# Altium PCB PCB1.PcbDoc
Units mm, origin at the board's own origin, x right, y up, seen from the top; angles counter-clockwise.
Board outline 100 x 90 mm, 2 copper layers (Top Layer, Bottom Layer); 30 components, 25 nets, 182 pads, 0 vias.
Unrouted connection lines stored in the file: 36.
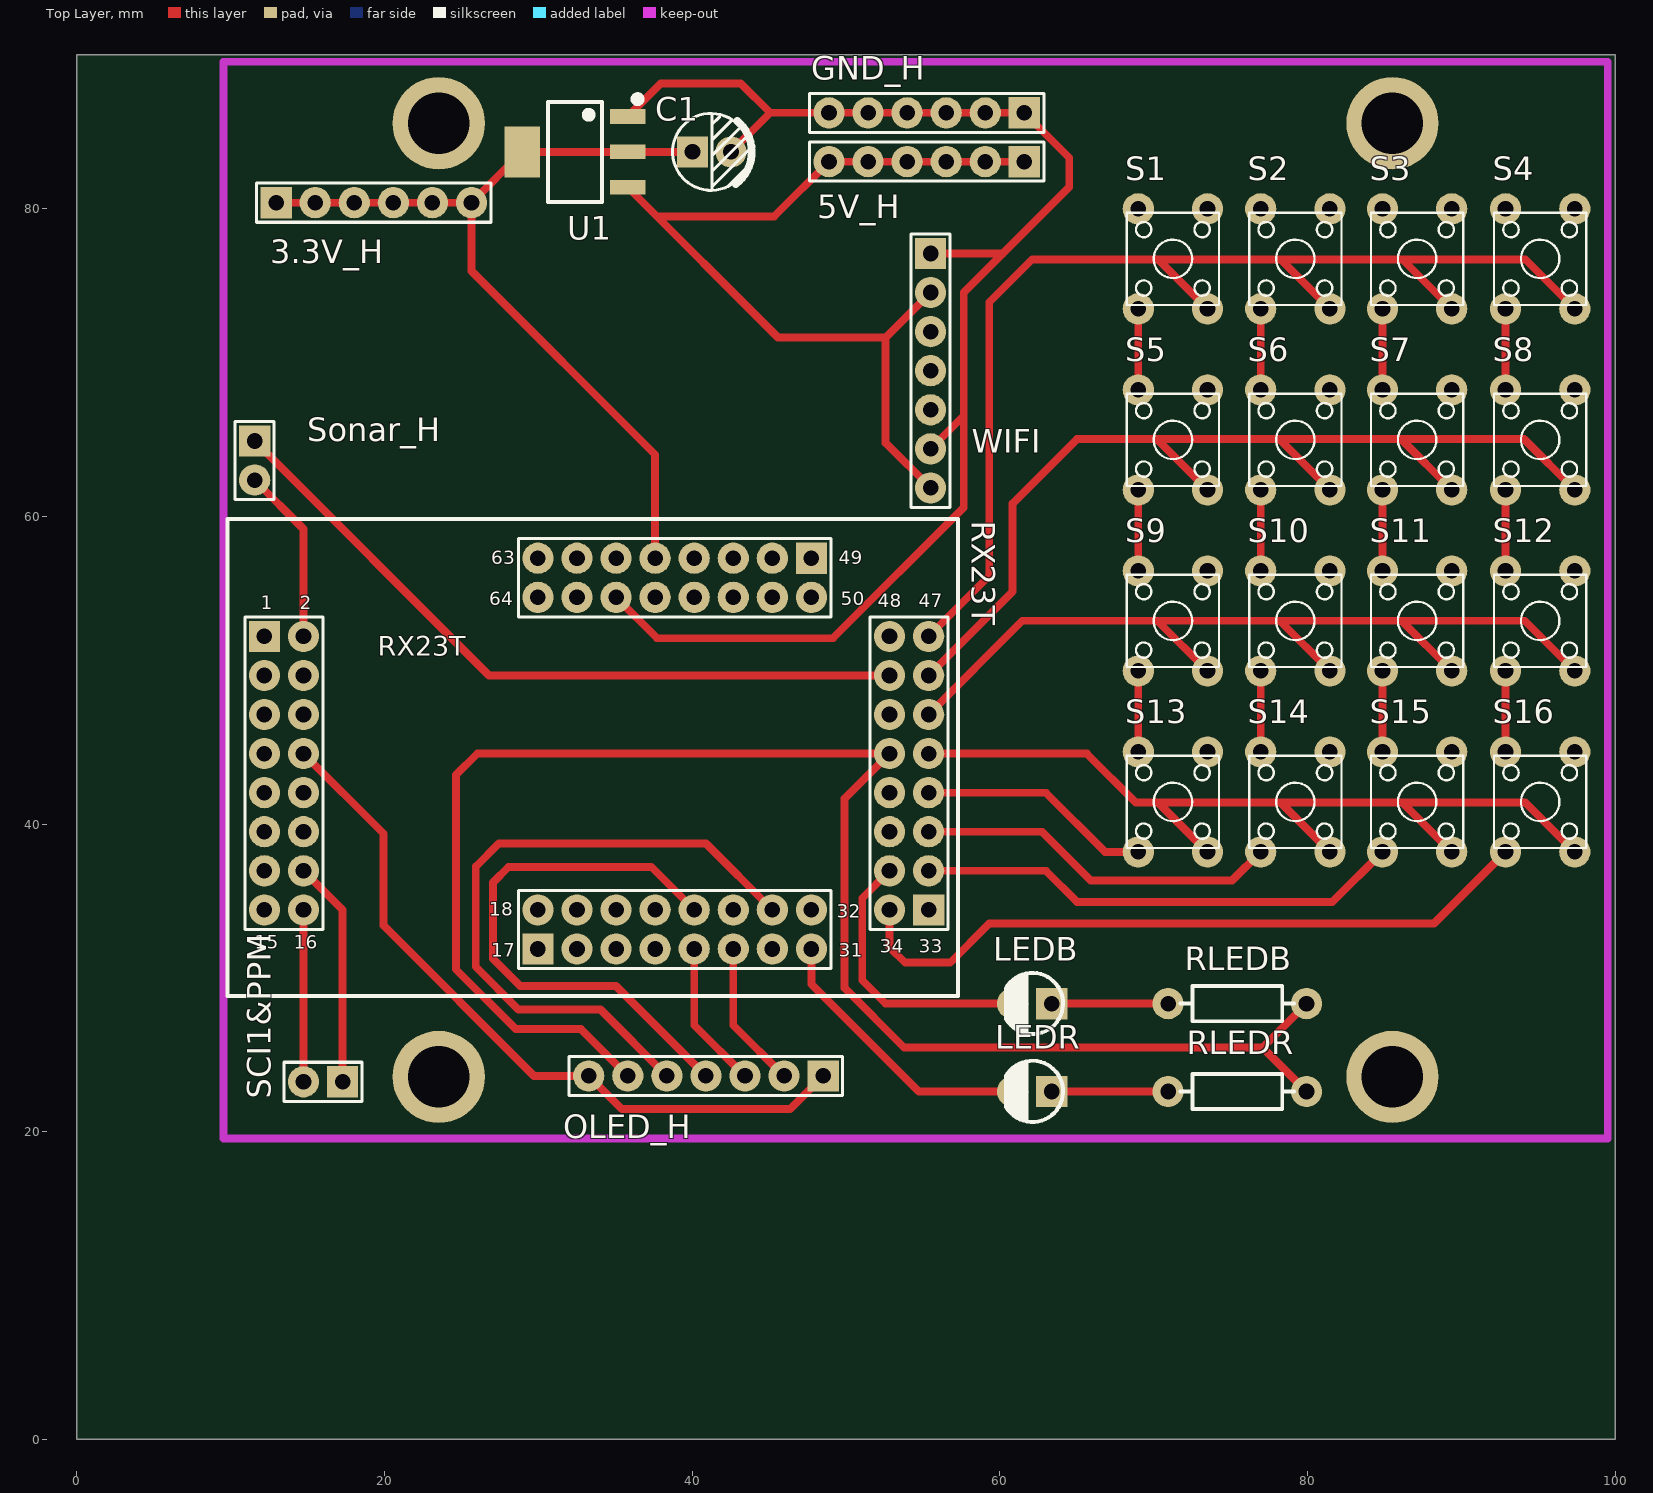
[diagram p0: Top Layer view]
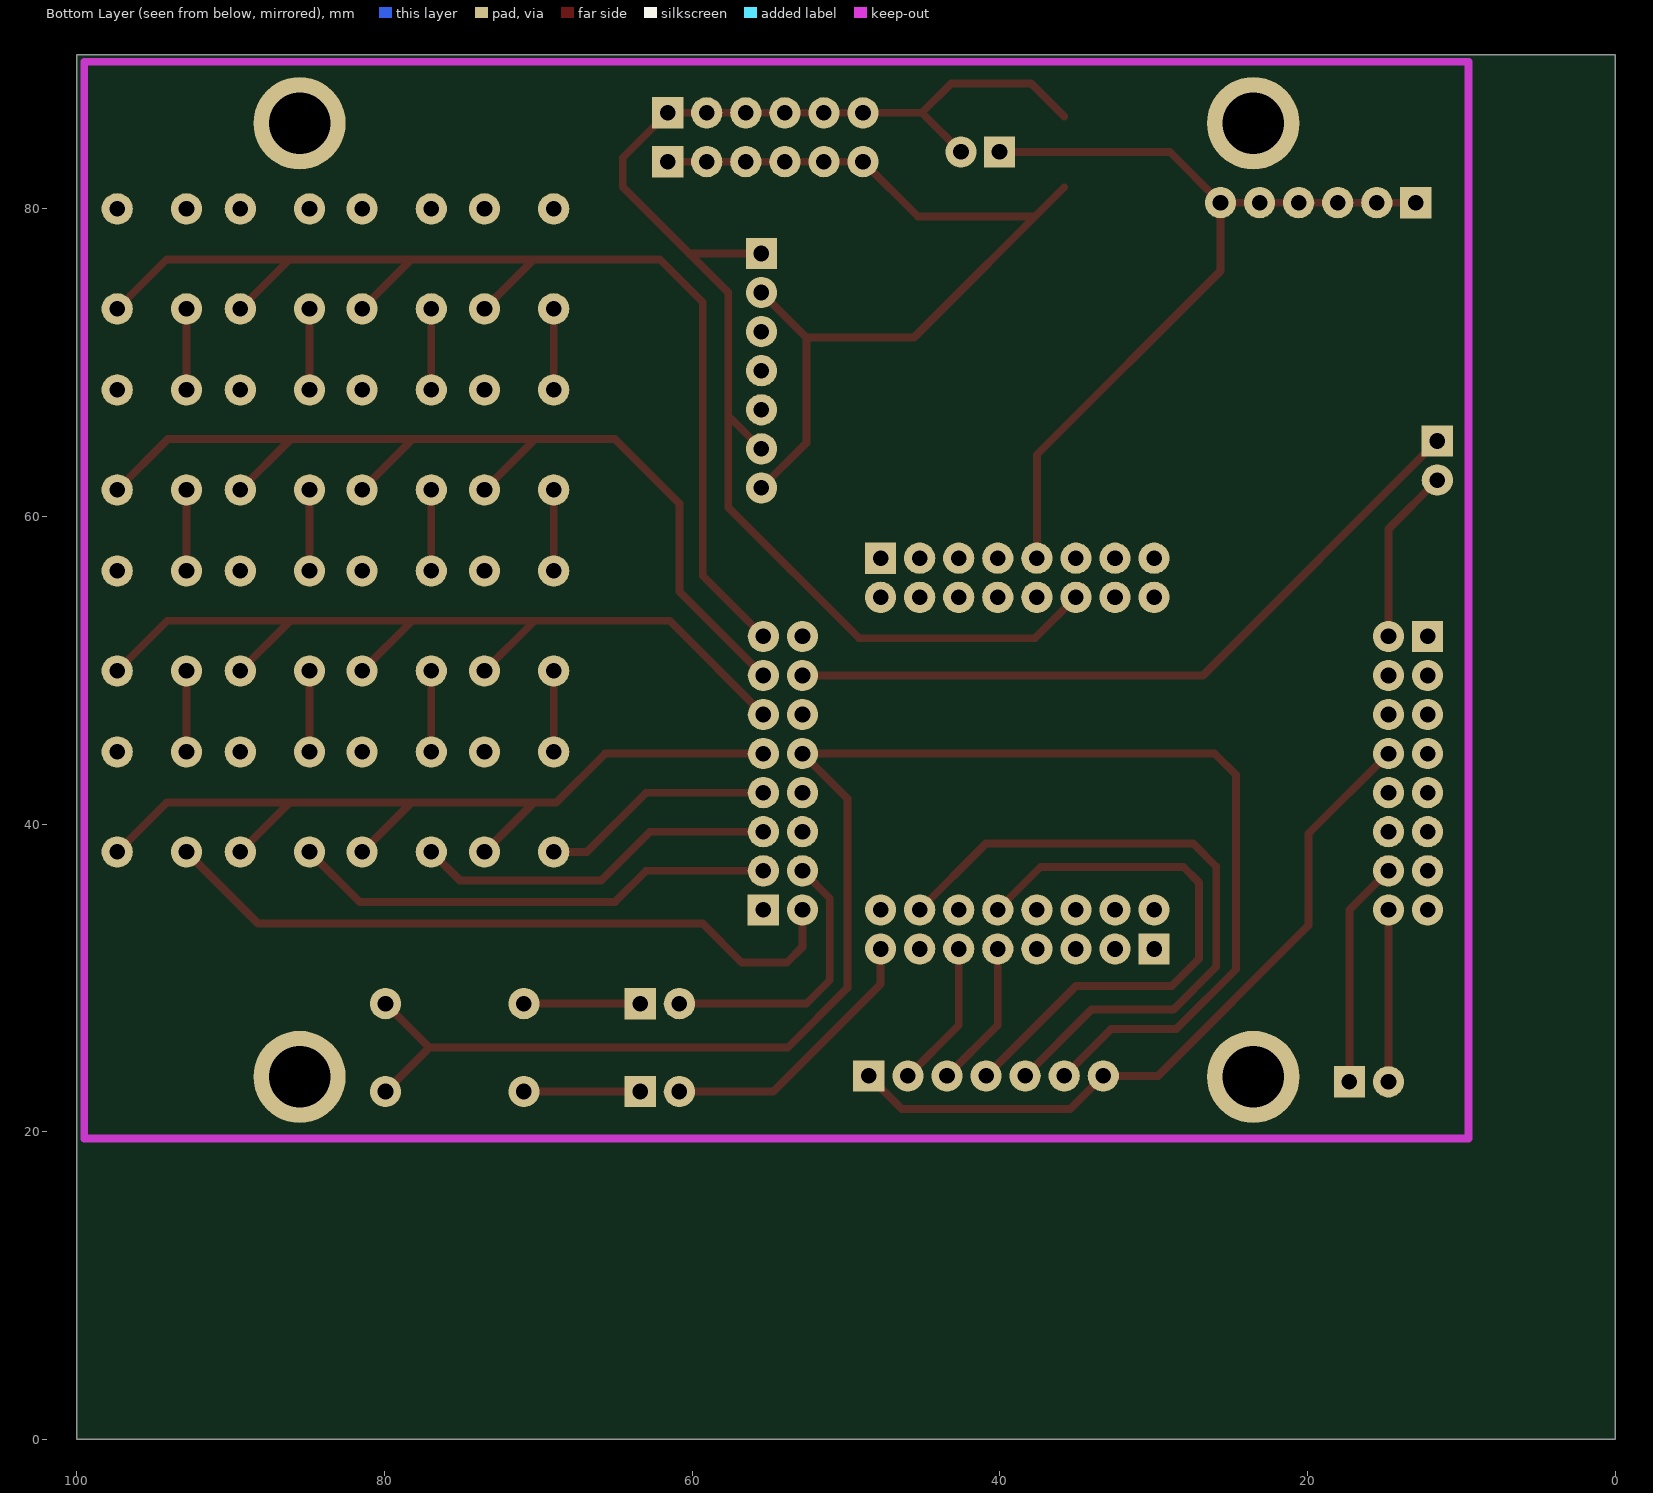
[diagram p1: Bottom Layer view, seen from below]
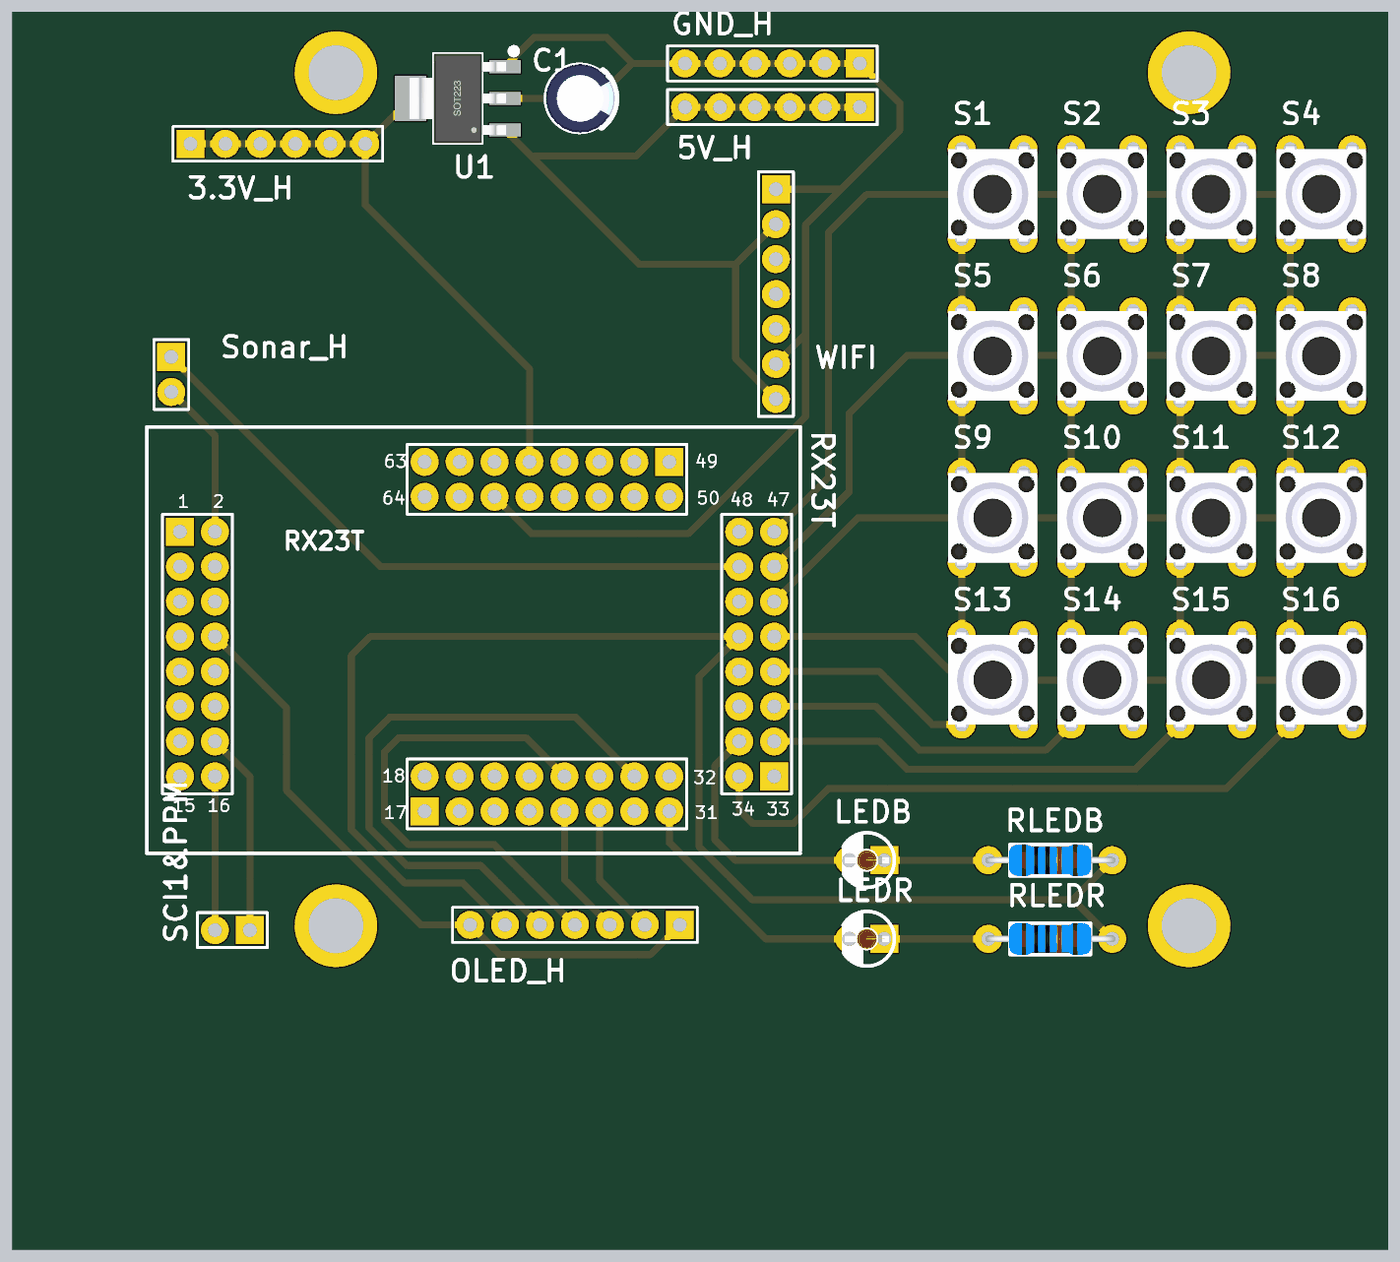
[diagram p2: 3D render of the assembled board from above, using the file's embedded part models]

## Layer stack, top to bottom
Top Solder: solder mask 0.0102, Solder Resist, Dk 3.5
Top Layer: signal copper 0.0356
Dielectric 1: dielectric 0.32, FR-4, Dk 4.8
Bottom Layer: signal copper 0.0356
Bottom Solder: solder mask 0.0102, Solder Resist, Dk 3.5

## Board outline
0,0 100,0 100,90 0,90

## Design rules (kind name [scope] priority, off if disabled: settings)
Clearance [All] p1: gap=0.508
PolygonConnect [All] p1: connectstyle=Relief reliefconductorwidth=0.254 reliefentries=4 polygonreliefangle="90 Angle" airgapwidth=0.254
RoutingVias [All] p1: holewidth=0.711 width=1.27 viastyle="Through Hole" minholewidth=0.711 minwidth=1.27 maxholewidth=0.711 maxwidth=1.27
SolderMaskExpansion [All] p1: expansion=0.102
Width [All] p1: maxlimit=0.508 minlimit=0.508 preferedwidth=0.508
30 further rules are at their usual default settings.

## Components (designator, comment, footprint, x,y, rotation, side; value= is the part's Value field where it differs from the comment)
3.3V_H "Header 6" HDR1X6 12.954,80.391 r0 top
5V_H "Header 6" HDR1X6 61.595,83.058 r180 top
C1 "Cap Pol3" "CAP 2.5*5*11" 41.275,83.693 r0 top
GND_H "Header 6" HDR1X6 61.595,86.233 r180 top
LEDB "LED" "LED 3MM-R" 62.103,28.321 r180 top
LEDR "LED" "LED 3MM-R" 62.103,22.606 r180 top
OLED_H "Header 7" HDR1X7 48.514,23.622 r180 top
RLEDB "1K" "RS 1/4W" 75.438,28.321 r0 top
RLEDR "1K" "RS 1/4W" 75.438,22.606 r0 top
RX23T "RX23T" RFR 33.782,44.577 r0 top
S1 "贴片轻触开关" SW-6*6 71.252,76.741 r0 top
S2 "贴片轻触开关" SW-6*6 79.211,76.741 r0 top
S3 "贴片轻触开关" SW-6*6 87.127,76.741 r0 top
S4 "贴片轻触开关" SW-6*6 95.128,76.741 r0 top
S5 "贴片轻触开关" SW-6*6 71.252,64.972 r0 top
S6 "贴片轻触开关" SW-6*6 79.211,64.972 r0 top
S7 "贴片轻触开关" SW-6*6 87.127,64.972 r0 top
S8 "贴片轻触开关" SW-6*6 95.128,64.972 r0 top
S9 "贴片轻触开关" SW-6*6 71.252,53.204 r0 top
S10 "贴片轻触开关" SW-6*6 79.211,53.204 r0 top
S11 "贴片轻触开关" SW-6*6 87.127,53.204 r0 top
S12 "贴片轻触开关" SW-6*6 95.128,53.204 r0 top
S13 "贴片轻触开关" SW-6*6 71.252,41.435 r0 top
S14 "贴片轻触开关" SW-6*6 79.211,41.435 r0 top
S15 "贴片轻触开关" SW-6*6 87.127,41.435 r0 top
S16 "贴片轻触开关" SW-6*6 95.128,41.435 r0 top
SCI1&PPM "Header 2" HDR1X2 17.272,23.241 r180 top
Sonar_H "Header 2" HDR1X2 11.557,64.897 r270 top
U1 "LM1117IMP-3.3" SOT223_M 32.385,83.693 r270 top
WIFI "Header 7" HDR1X7 55.499,77.089 r270 top

## Footprints (in the part's own frame and the unit in brackets; to place one, negate y for a bottom-side part, rotate by r counter-clockwise, add the part's x,y. Pads: shape width x height; smd on the part's side, far side on the other; paste and mask are expansions set on the pad)
"CAP 2.5*5*11" [mil] "脚距2.5mm直径5mm高度11mm"
  rect 80x80 hole 40: 1(-49.21,0)
  round 80 hole 40: 2(49.21,0)
  silkscreen extent -100,-98 102,98, body extent -98,-98 99,98, height 434
HDR1X2 [mil] "Connector; Header; 2 Position"
  rect 80x80 hole 40: 1(0,0)
  round 80 hole 40: 2(100,0)
  silkscreen extent -50,-50 150,50
HDR1X6 [mil] "Connector; Header; 6 Position"
  rect 80x80 hole 40: 1(0,0)
  round 80 hole 40: 2(100,0) 3(200,0) 4(300,0) 5(400,0) 6(500,0)
  silkscreen extent -50,-50 550,50
HDR1X7 [mil] "Connector; Header; 7 Position"
  rect 80x80 hole 40: 1(0,0)
  round 80 hole 40: 2(100,0) 3(200,0) 4(300,0) 5(400,0) 6(500,0) 7(600,0)
  silkscreen extent -50,-50 650,50
"LED 3MM-R" [mil] "红色3mm直插LED"
  rect 80x80 hole 40: 1(-50,0)
  round 80 hole 40: 2(50,0)
  silkscreen extent -79,-79 68,78, body extent -77,-77 65,77, height 219
RFR [mil]
  rect 80x80 hole 40: 1(-850,300) 17(-150,-500) 33(850,-400) 49(550,500)
  round 80 hole 40: 2(-750,300) 3(-850,200) 4(-750,200) 5(-850,100) 6(-750,100) 7(-850,0) 8(-750,0) 9(-850,-100) 10(-750,-100) 11(-850,-200) 12(-750,-200) 13(-850,-300) 14(-750,-300) 15(-850,-400) 16(-750,-400) 18(-150,-400) 19(-50,-500) 20(-50,-400) 21(50,-500) 22(50,-400) 23(150,-500) 24(150,-400) 25(250,-500) 26(250,-400) 27(350,-500) 28(350,-400) 29(450,-500) 30(450,-400) 31(550,-500) 32(550,-400) 34(750,-400) 35(850,-300) 36(750,-300) 37(850,-200) 38(750,-200) 39(850,-100) 40(750,-100) 41(850,0) 42(750,0) 43(850,100) 44(750,100) 45(850,200) 46(750,200) 47(850,300) 48(750,300) 50(550,400) 51(450,500) 52(450,400) 53(350,500) 54(350,400) 55(250,500) 56(250,400) 57(150,500) 58(150,400) 59(50,500) 60(50,400) 61(-50,500) 62(-50,400) 63(-150,500) 64(-150,400)
  silkscreen extent -945,-620 925,600
"RS 1/4W" [mil] "直插色环电阻，脚距9mm，直径2.3mm"
  round 80 hole 40: 1(-177.17,0) 2(177.17,0)
  silkscreen extent -145,-45 145,45, body extent -186,-46 186,46, height 91
SOT223_M [mm] "6.4x7x1.6mm(长宽高)"
  rect 0.95x2.3 smd: 1(-2.3,3.429) 2(0,3.429) 3(2.3,3.429)
  rect 3.3x2.3 smd: 2(0,-3.429)
  silkscreen extent -3.63,-1.75 3.25,4.26, body extent -3.25,-3.51 3.25,3.51, height 1.65
SW-6*6 [mil]
  round 80 hole 40: 1(-88.58,-127.95) 1(-88.58,127.95) 2(88.58,-127.95) 2(88.58,127.95)
  silkscreen extent -118,-118 118,118, body extent -128,-163 128,163, height 197

## Part data
3.3V_H 5V_H GND_H: "Header, 6-Pin"
C1: "Polarized Capacitor (Surface Mount)"
OLED_H WIFI: "Header, 7-Pin"
RLEDB RLEDR: library part R, "R_0603"
SCI1&PPM Sonar_H: "Header, 2-Pin"
U1: library part Component_1_1

## Free pads (board coordinates)
  round 6 hole 4: 8(23.525,23.558) 9(85.525,23.558) 10(23.525,85.558) 11(85.525,85.558)

## Nets (pads, with @x,y where several pads share a name; then routed paths per layer and width w, separated by ;. In a path a pad name is that pad's centre, name@x,y a point inside that pad or via, vN(x,y) a via of type N, cw(c..) or ccw(c..) an arc to the next point about the centre after c; other vN are vias at no path point)
3.3V: 3.3V_H.1 3.3V_H.2 3.3V_H.3 3.3V_H.4 3.3V_H.5 3.3V_H.6 C1.1 OLED_H.6 RLEDB.2 RLEDR.2 RX23T.42 RX23T.57 U1.2 | length 165
  Top Layer w0.508: 3.3V_H.1 3.3V_H.2 3.3V_H.3 3.3V_H.4 3.3V_H.5 3.3V_H.6 ; OLED_H.6 32.766,26.67 28.535,26.67 24.638,30.567 24.638,43.18 26.035,44.577 RX23T.42 49.911,41.656 49.911,29.337 53.785,25.463 77.081,25.463 RLEDB.2 ; RX23T.57 37.592,64.008 25.654,75.946 3.3V_H.6 ; C1.1 35.814,83.693 28.956,83.693 3.3V_H.6 ; 77.271,25.273 RLEDR.2
5V: 5V_H.1 5V_H.2 5V_H.3 5V_H.4 5V_H.5 5V_H.6 U1.3 WIFI.2 WIFI.7 | length 61.2
  Top Layer w0.508: U1.3 45.579,71.628 52.578,71.628 ; 37.832,79.502 45.339,79.502 5V_H.6 5V_H.5 5V_H.4 5V_H.3 5V_H.2 5V_H.1 ; WIFI.7 52.578,64.77 52.578,71.628 ; WIFI.2 52.578,71.628
C1: RX23T.39 S1.1 S5.1 S9.1 S13.1 | length 31
  Top Layer w0.508: RX23T.39 62.992,42.037 66.844,38.185 S13.1@69.002,38.185 ; S13.1@69.002,44.685 S9.1@69.002,49.954 ; S9.1@69.002,56.454 S5.1@69.002,61.722 ; S5.1@69.002,68.222 S1.1@69.002,73.491
C2: RX23T.37 S2.1 S6.1 S10.1 S14.1 | length 39.5
  Top Layer w0.508: RX23T.37 62.738,39.497 65.913,36.322 75.098,36.322 S14.1@76.961,38.185 ; S14.1@76.961,44.685 S10.1@76.961,49.954 ; S10.1@76.961,56.454 S6.1@76.961,61.722 ; S6.1@76.961,68.222 S2.1@76.961,73.491
C3: RX23T.35 S3.1 S7.1 S11.1 S15.1 | length 47.5
  Top Layer w0.508: RX23T.35 62.992,36.957 65.024,34.925 81.617,34.925 S15.1@84.877,38.185 ; S15.1@84.877,44.685 S11.1@84.877,49.954 ; S11.1@84.877,56.454 S7.1@84.877,61.722 ; S7.1@84.877,68.222 S3.1@84.877,73.491
C4: RX23T.34 S4.1 S8.1 S12.1 S16.1 | length 61.7
  Top Layer w0.508: RX23T.34 52.832,32.004 53.848,30.988 56.769,30.988 59.309,33.528 88.221,33.528 S16.1@92.878,38.185 ; S16.1@92.878,44.685 S12.1@92.878,49.954 ; S12.1@92.878,56.454 S8.1@92.878,61.722 ; S8.1@92.878,68.222 S4.1@92.878,73.491
DC: OLED_H.2 RX23T.27 | length 9.6
  Top Layer w0.508: RX23T.27 42.672,26.924 OLED_H.2
ECHO: RX23T.46 Sonar_H.1 | length 47.6
  Top Layer w0.508: Sonar_H.1 26.797,49.657 RX23T.46
GND: C1.2 GND_H.1 GND_H.2 GND_H.3 GND_H.4 GND_H.5 GND_H.6 OLED_H.1 OLED_H.7 RX23T.8 RX23T.60 U1.1 WIFI.1 WIFI.6 | length 143.5
  Top Layer w0.508: RX23T.8 19.939,39.37 19.939,33.401 29.718,23.622 OLED_H.7 35.433,21.463 46.355,21.463 OLED_H.1 ; RX23T.60 37.719,52.07 49.149,52.07 57.658,60.579 57.658,66.548 ; U1.1 37.959,88.138 43.16,88.138 45.065,86.233 ; C1.2 45.065,86.233 ; WIFI.6 57.658,66.548 ; WIFI.1 60.198,77.089 ; 45.065,86.233 GND_H.6 GND_H.5 GND_H.4 GND_H.3 GND_H.2 GND_H.1 64.516,83.312 64.516,81.407 60.198,77.089 ; 57.658,66.548 57.658,74.549 60.198,77.089
LEDB: LEDB.2 RX23T.36 | length 18.3
  Top Layer w0.508: RX23T.36 51.054,35.179 51.054,29.845 52.578,28.321 LEDB.2
LEDR: LEDR.2 RX23T.31 | length 18.3
  Top Layer w0.508: RX23T.31 47.752,29.591 54.737,22.606 LEDR.2
NetLEDB_1: LEDB.1 RLEDB.1 | length 7.6
  Top Layer w0.508: LEDB.1 RLEDB.1
NetLEDR_1: LEDR.1 RLEDR.1 | length 7.6
  Top Layer w0.508: LEDR.1 RLEDR.1
PPM: RX23T.16 SCI1&PPM.2 | length 11.2
  Top Layer w0.508: SCI1&PPM.2 RX23T.16
R1: RX23T.47 S1.2 S2.2 S3.2 S4.2 | length 77.6
  Top Layer w0.508: RX23T.47 59.309,56.134 59.309,73.914 62.103,76.708 70.285,76.708 ; S1.2@73.502,73.491 70.285,76.708 ; S2.2@81.461,73.491 78.244,76.708 ; S3.2@89.377,73.491 86.16,76.708 ; S4.2@97.378,73.491 94.161,76.708 86.16,76.708 ; 70.285,76.708 78.244,76.708 ; 78.244,76.708 86.16,76.708
R2: RX23T.45 S5.2 S6.2 S7.2 S8.2 | length 67.1
  Top Layer w0.508: RX23T.45 60.833,55.118 60.833,60.833 65.024,65.024 70.2,65.024 ; S5.2@73.502,61.722 70.2,65.024 ; S6.2@81.461,61.722 78.159,65.024 ; S7.2@89.377,61.722 86.075,65.024 ; S8.2@97.378,61.722 94.076,65.024 86.075,65.024 ; 70.2,65.024 78.159,65.024 ; 78.159,65.024 86.075,65.024
R3: RX23T.43 S9.2 S10.2 S11.2 S12.2 | length 59.7
  Top Layer w0.508: RX23T.43 61.468,53.213 70.243,53.213 ; S9.2@73.502,49.954 70.243,53.213 ; S10.2@81.461,49.954 78.201,53.213 ; S11.2@89.377,49.954 86.118,53.213 ; S12.2@97.378,49.954 94.119,53.213 86.118,53.213 ; 70.243,53.213 78.201,53.213 ; 78.201,53.213 86.118,53.213
R4: RX23T.41 S13.2 S14.2 S15.2 S16.2 | length 58.3
  Top Layer w0.508: RX23T.41 65.659,44.577 68.834,41.402 70.285,41.402 ; S13.2@73.502,38.185 70.285,41.402 ; S14.2@81.461,38.185 78.244,41.402 ; S15.2@89.377,38.185 86.16,41.402 ; S16.2@97.378,38.185 94.161,41.402 86.16,41.402 ; 70.285,41.402 78.244,41.402 ; 78.244,41.402 86.16,41.402
RES: OLED_H.3 RX23T.25 | length 9.6
  Top Layer w0.508: RX23T.25 40.132,26.924 OLED_H.3
SCI1: RX23T.14 SCI1&PPM.1 | length 14.8
  Top Layer w0.508: RX23T.14 17.272,34.417 SCI1&PPM.1
SCK: OLED_H.5 RX23T.30 | length 43.6
  Top Layer w0.508: OLED_H.5 34.036,27.94 28.702,27.94 25.925,30.717 25.925,37.228 27.432,38.735 40.894,38.735 RX23T.30
SDA: OLED_H.4 RX23T.26 | length 36.6
  Top Layer w0.508: RX23T.26 37.338,37.211 28.067,37.211 27.051,36.195 27.051,31.242 28.829,29.464 35.052,29.464 OLED_H.4
TRIGGER: RX23T.2 Sonar_H.2 | length 11.5
  Top Layer w0.508: Sonar_H.2 14.732,59.182 RX23T.2
WIFI_RX: RX23T.18 WIFI.5
WIFI_TX: RX23T.19 WIFI.4
pads on no net: RX23T.1 RX23T.3 RX23T.4 RX23T.5 RX23T.6 RX23T.7 RX23T.9 RX23T.10 RX23T.11 RX23T.12 RX23T.13 RX23T.15 RX23T.17 RX23T.20 RX23T.21 RX23T.22 RX23T.23 RX23T.24 RX23T.28 RX23T.29 RX23T.32 RX23T.33 RX23T.38 RX23T.40 RX23T.44 RX23T.48 RX23T.49 RX23T.50 RX23T.51 RX23T.52 RX23T.53 RX23T.54 RX23T.55 RX23T.56 RX23T.58 RX23T.59 RX23T.61 RX23T.62 RX23T.63 RX23T.64 WIFI.3

## Keep-outs
Keep-Out Layer:
  lines w0.508: 9.525,19.558 99.525,19.558 99.525,89.558 9.525,89.558 9.525,19.558

## Text inside footprints (layer, text, board x,y; h text height)
RX23T: Top Overlay "64" at 26.797,54.229 h0.89; Top Overlay "63" at 26.924,56.896 h0.89; Top Overlay "49" at 49.53,56.896 h0.89; Top Overlay "50" at 49.657,54.229 h0.89; Top Overlay "48" at 52.07,54.102 h0.89; Top Overlay "47" at 54.737,54.102 h0.89; Top Overlay "33" at 54.737,31.623 h0.89; Top Overlay "34" at 52.197,31.623 h0.89; Top Overlay "32" at 49.403,33.909 h0.89; Top Overlay "31" at 49.53,31.369 h0.89; Top Overlay "17" at 26.924,31.369 h0.89; Top Overlay "18" at 26.797,34.036 h0.89; Top Overlay "16" at 14.097,31.877 h0.89; Top Overlay "15" at 11.557,31.877 h0.89; Top Overlay "1" at 11.938,53.975 h0.89; Top Overlay "2" at 14.478,53.975 h0.89